# EAGLE board homeboard1 (EAGLE 6.0)
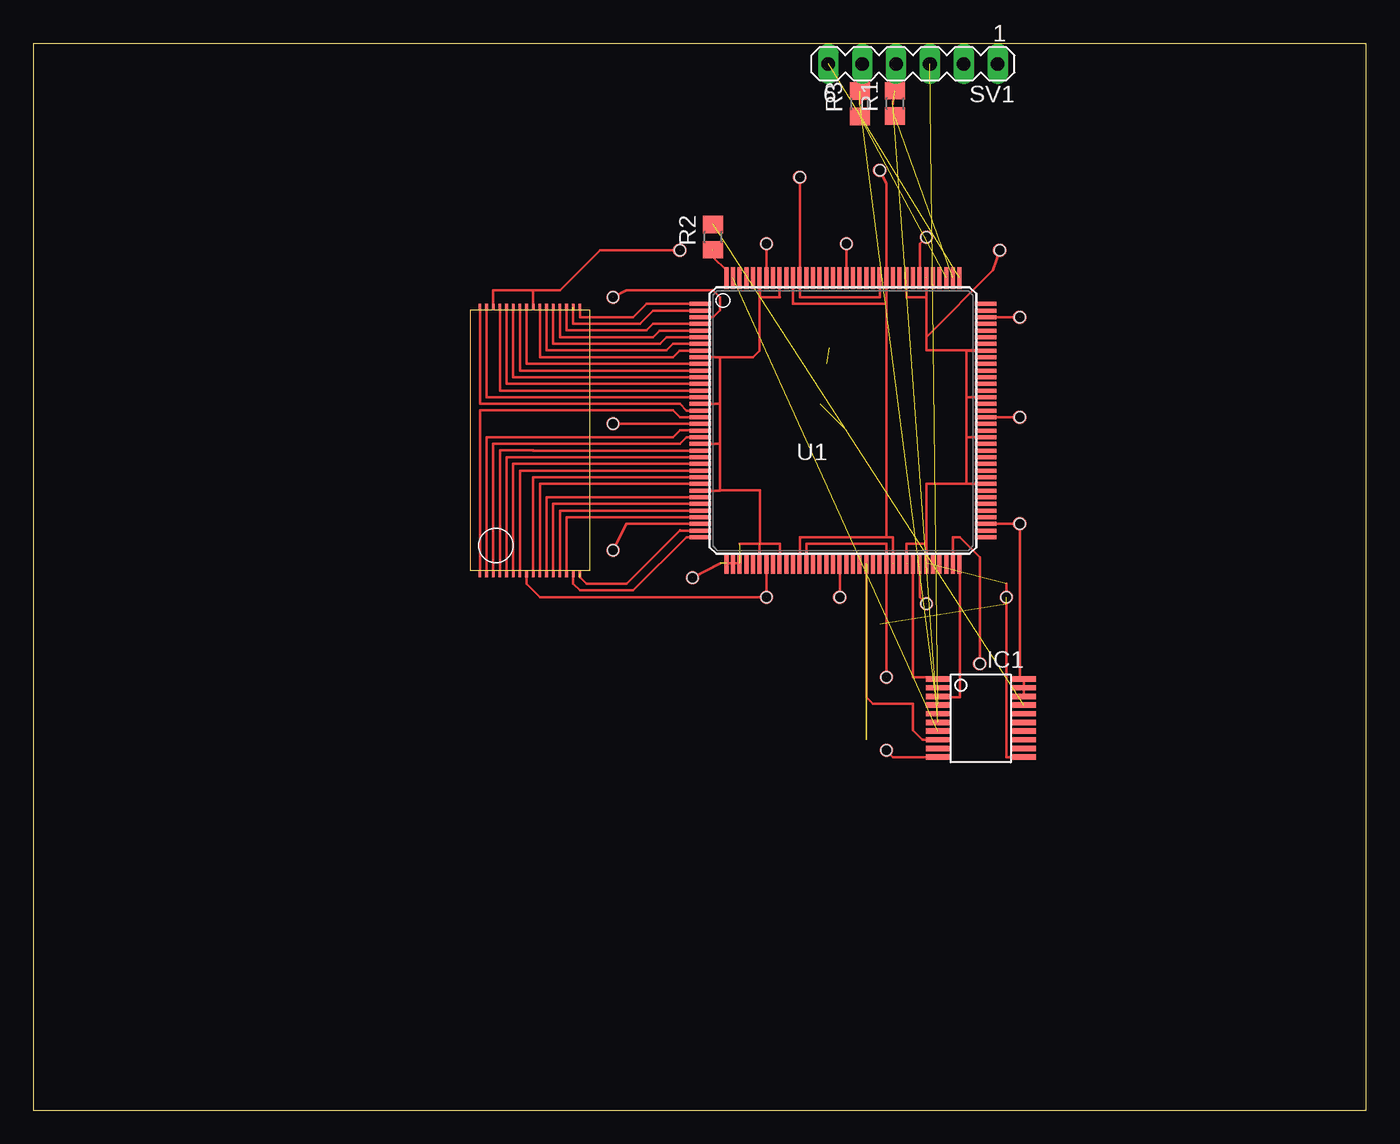
[diagram p0: board, top side]
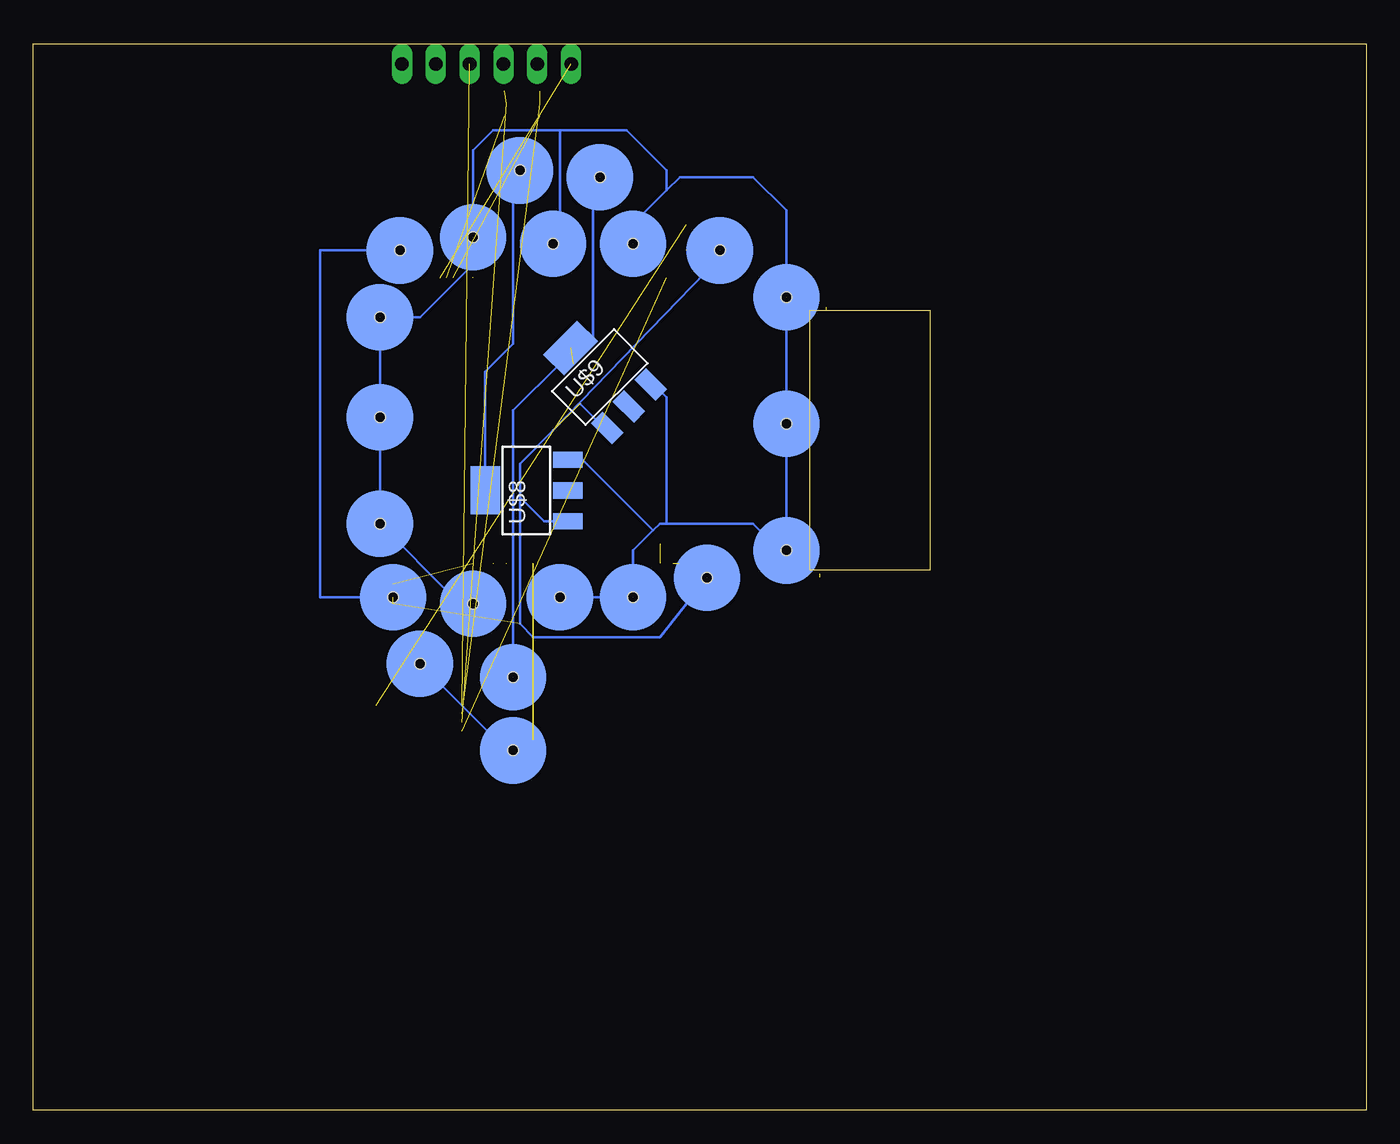
[diagram p1: board, bottom side, seen from below]

Size 100 x 80 mm. Coordinates in mm from the lower left corner, seen from the top.
Outline: 0,0 100,0 100,80 0,80 0,0
Copper layers (1*16): Top 0.0356mm / dielectric 1.5011mm / Bottom 0.0356mm
Design rules: minimum track width 6mil, minimum drill 13mil, track to track 6mil, track to pad 6mil, pad to pad 6mil, via to via 6mil, smd to smd 6mil, copper to edge 15mil, drill to drill 6mil, minimum pad ring 7mil, minimum via ring 7mil, stop-mask expansion 4mil, vias tented up to drill 0mil, thermal gap 10mil
Net classes: 0 default: width 0.203 mm, drill 0.254 mm, clearance 0.254 mm

## Footprints (pad centres in the part's own frame; a part is rotated, then mirrored left to right if it is on the bottom)
VO20 = smd 0.4 x 1.8: 1 5.85,6.15; 2 5.2,6.15; 3 4.55,6.15; 4 3.9,6.15; 5 3.25,6.15; 6 2.6,6.15; 7 1.95,6.15; 8 1.3,6.15; 9 0.65,6.15; 10 0,6.15; 11 0,-0.3; 12 0.65,-0.3; 13 1.3,-0.3; 14 1.95,-0.3; 15 2.6,-0.3; 16 3.25,-0.3; 17 3.9,-0.3; 18 4.55,-0.3; 19 5.2,-0.3; 20 5.85,-0.3
R0805 = smd 1.3 x 1.5: 1 -0.95,0; 2 0.95,0
MA06-1 = drill 1.016 long: 1 -6.35,0; 2 -3.81,0; 3 -1.27,0; 4 1.27,0; 5 3.81,0; 6 6.35,0
TQ144 = smd 1.6 x 0.3: P1 -10.7,8.75; P2 -10.7,8.25; P3 -10.7,7.75; P4 -10.7,7.25; P5 -10.7,6.75; P6 -10.7,6.25; P7 -10.7,5.75; P8 -10.7,5.25; P9 -10.7,4.75; P10 -10.7,4.25; P11 -10.7,3.75; P12 -10.7,3.25; P13 -10.7,2.75; P14 -10.7,2.25; P15 -10.7,1.75; P16 -10.7,1.25; P17 -10.7,0.75; P18 -10.7,0.25; P19 -10.7,-0.25; P20 -10.7,-0.75; P21 -10.7,-1.25; P22 -10.7,-1.75; P23 -10.7,-2.25; P24 -10.7,-2.75; P25 -10.7,-3.25; P26 -10.7,-3.75; P27 -10.7,-4.25; P28 -10.7,-4.75; P29 -10.7,-5.25; P30 -10.7,-5.75; P31 -10.7,-6.25; P32 -10.7,-6.75; P33 -10.7,-7.25; P34 -10.7,-7.75; P35 -10.7,-8.25; P36 -10.7,-8.75; P73 10.7,-8.75; P74 10.7,-8.25; P75 10.7,-7.75; P76 10.7,-7.25; P77 10.7,-6.75; P78 10.7,-6.25; P79 10.7,-5.75; P80 10.7,-5.25; P81 10.7,-4.75; P82 10.7,-4.25; P83 10.7,-3.75; P84 10.7,-3.25; P85 10.7,-2.75; P86 10.7,-2.25; P87 10.7,-1.75; P88 10.7,-1.25; P89 10.7,-0.75; P90 10.7,-0.25; P91 10.7,0.25; P92 10.7,0.75; P93 10.7,1.25; P94 10.7,1.75; P95 10.7,2.25; P96 10.7,2.75; P97 10.7,3.25; P98 10.7,3.75; P99 10.7,4.25; P100 10.7,4.75; P101 10.7,5.25; P102 10.7,5.75; P103 10.7,6.25; P104 10.7,6.75; P105 10.7,7.25; P106 10.7,7.75; P107 10.7,8.25; P108 10.7,8.75 | smd 0.3 x 1.6: P37 -8.75,-10.7; P38 -8.25,-10.7; P39 -7.75,-10.7; P40 -7.25,-10.7; P41 -6.75,-10.7; P42 -6.25,-10.7; P43 -5.75,-10.7; P44 -5.25,-10.7; P45 -4.75,-10.7; P46 -4.25,-10.7; P47 -3.75,-10.7; P48 -3.25,-10.7; P49 -2.75,-10.7; P50 -2.25,-10.7; P51 -1.75,-10.7; P52 -1.25,-10.7; P53 -0.75,-10.7; P54 -0.25,-10.7; P55 0.25,-10.7; P56 0.75,-10.7; P57 1.25,-10.7; P58 1.75,-10.7; P59 2.25,-10.7; P60 2.75,-10.7; P61 3.25,-10.7; P62 3.75,-10.7; P63 4.25,-10.7; P64 4.75,-10.7; P65 5.25,-10.7; P66 5.75,-10.7; P67 6.25,-10.7; P68 6.75,-10.7; P69 7.25,-10.7; P70 7.75,-10.7; P71 8.25,-10.7; P72 8.75,-10.7; P109 8.75,10.7; P110 8.25,10.7; P111 7.75,10.7; P112 7.25,10.7; P113 6.75,10.7; P114 6.25,10.7; P115 5.75,10.7; P116 5.25,10.7; P117 4.75,10.7; P118 4.25,10.7; P119 3.75,10.7; P120 3.25,10.7; P121 2.75,10.7; P122 2.25,10.7; P123 1.75,10.7; P124 1.25,10.7; P125 0.75,10.7; P126 0.25,10.7; P127 -0.25,10.7; P128 -0.75,10.7; P129 -1.25,10.7; P130 -1.75,10.7; P131 -2.25,10.7; P132 -2.75,10.7; P133 -3.25,10.7; P134 -3.75,10.7; P135 -4.25,10.7; P136 -4.75,10.7; P137 -5.25,10.7; P138 -5.75,10.7; P139 -6.25,10.7; P140 -6.75,10.7; P141 -7.25,10.7; P142 -7.75,10.7; P143 -8.25,10.7; P144 -8.75,10.7
VIA_DIY = smd 5 x 5 bottom: B 0,0 | smd 1 x 1: T 0,0 | hole 0.8: 0,0
TSOP32 = smd 0.5 x 0.2: P1 -9.75,3.75; P2 -9.75,3.25; P3 -9.75,2.75; P4 -9.75,2.25; P5 -9.75,1.75; P6 -9.75,1.25; P7 -9.75,0.75; P8 -9.75,0.25; P9 -9.75,-0.25; P10 -9.75,-0.75; P11 -9.75,-1.25; P12 -9.75,-1.75; P13 -9.75,-2.25; P14 -9.75,-2.75; P15 -9.75,-3.25; P16 -9.75,-3.75; P17 10.25,-3.75; P18 10.25,-3.25; P19 10.25,-2.75; P20 10.25,-2.25; P21 10.25,-1.75; P22 10.25,-1.25; P23 10.25,-0.75; P24 10.25,-0.25; P25 10.25,0.25; P26 10.25,0.75; P27 10.25,1.25; P28 10.25,1.75; P29 10.25,2.25; P30 10.25,2.75; P31 10.25,3.25; P32 10.25,3.75
SOT223 = smd 1.219 x 2.235: 1 -2.311,-3.099; 2 0,-3.099; 3 2.311,-3.099 | smd 3.6 x 2.2: 4 0,3.099

## Placement (x,y rotation side)
IC1  XCF02S  [VO20]  74,26.5 90 top
R1  100  [R0805]  64.66,75.53 90 top
R2  100  [R0805]  51,65.5 90 top
R3  100  [R0805]  62,75.5 90 top
SV1  jtag  [MA06-1]  66,78.5 180 top
U1  XC3S400TQ144  [TQ144]  60.74,51.74 0 top
U$1  VIA_DIY  [VIA_DIY]  64,32.5 0 top
U$2  VIA_DIY  [VIA_DIY]  73,38.5 0 top
U$3  VIA_DIY  [VIA_DIY]  48.5,64.5 0 top
U$4  AS6C4008  [TSOP32]  37.25,50 90 top
U$5  VIA_DIY  [VIA_DIY]  49.47,39.97 0 top
U$6  VIA_DIY  [VIA_DIY]  55,65 0 top
U$7  VIA_DIY  [VIA_DIY]  67,65.5 0 top
U$8  2.5V  [SOT223]  63,46.5 90 bottom
U$9  1.2V  [SOT223]  57.5,55 45 bottom
U$10  VIA_DIY  [VIA_DIY]  61,65 0 top
U$11  VIA_DIY  [VIA_DIY]  63.5,70.5 0 top
U$12  VIA_DIY  [VIA_DIY]  64,27 0 top
U$13  VIA_DIY  [VIA_DIY]  71,33.5 0 top
U$14  VIA_DIY  [VIA_DIY]  43.5,42 0 top
U$15  VIA_DIY  [VIA_DIY]  43.5,51.5 0 top
U$18  VIA_DIY  [VIA_DIY]  43.5,61 0 top
U$19  VIA_DIY  [VIA_DIY]  67,38 0 top
U$20  VIA_DIY  [VIA_DIY]  72.5,64.5 0 top
U$23  VIA_DIY  [VIA_DIY]  57.5,70 0 top
U$25  VIA_DIY  [VIA_DIY]  60.5,38.5 0 top
U$26  VIA_DIY  [VIA_DIY]  55,38.5 0 top
U$27  VIA_DIY  [VIA_DIY]  74,59.5 0 top
U$28  VIA_DIY  [VIA_DIY]  74,52 0 top
U$29  VIA_DIY  [VIA_DIY]  74,44 0 top

## Library data of the parts
IC1 = smd-special
R1-R3 = rcl
SV1 = con-lstb; OC_FARNELL: unknown; OC_NEWARK: unknown
U1 = xilinx_spartan3_virtex4_and_5
U$1-U$15 U$18-U$20 U$23 U$25-U$29 = cpcfpga

## Nets
GND: IC1.11 U1.P9 U1.P16 U1.P22 U1.P29 U1.P37 U1.P38 U1.P39 U1.P42 U1.P45 U1.P136 U1.P139 U$2.B U$3.B U$3.T U$4.P24 U$4.P30 U$5.B U$5.T U$8.1 U$9.1 U$20.B
N$1: U1.P1 U$4.P17
N$2: U1.P2 U$4.P18
N$3: U1.P126 U$10.T
N$4: U1.P64 U1.P67 U1.P81 U1.P88 U1.P94 U1.P101 U1.P114 U1.P117 U$2.T U$20.T
N$5: U1.P12 U$4.P27
N$6: U1.P13 U$4.P28
N$7: U1.P6 U$4.P21
N$8: R1.1 U1.P110
N$9: IC1.1 U1.P65
N$10: U1.P7 U$4.P22
N$11: U1.P8 U$4.P23
N$12: R2.1 U1.P144
N$13: IC1.17 R2.2
N$14: U1.P34 U$14.T
N$15: U1.P19 U$15.T
N$16: R3.1 U1.P111
N$17: IC1.7 U1.P143
N$18: IC1.8 U1.P58
N$19: IC1.3 U1.P72
N$20: U1.P71 U$13.T
N$22: U1.P10 U$4.P25
N$23: U1.P11 U$4.P26
N$24: U1.P14 U$4.P29
N$25: U1.P54 U$25.T
N$26: IC1.18 IC1.19 IC1.20 U1.P75 U$29.T
N$27: U1.P15 U$4.P31
N$28: U1.P91 U$28.T
N$29: U1.P17 U$4.P32
N$30: U1.P28 U$4.P10
N$31: U1.P30 U$4.P11
N$32: U1.P31 U$4.P12
N$33: U1.P20 U$4.P2
N$34: U1.P32 U$4.P13
N$35: U1.P33 U$4.P14
N$36: U1.P27 U$4.P9
N$37: U1.P35 U$4.P16
N$38: U1.P36 U$4.P15
N$39: U$8.4 U$11.B
N$40: IC1.10 U$12.T
N$41: U$12.B U$13.B
N$48: U1.P5 U$4.P20
N$49: U1.P4 U$4.P19
N$50: U1.P18 U$4.P1
N$52: U1.P23 U$4.P4
N$53: U1.P21 U$4.P3
N$54: U1.P24 U$4.P5
N$55: U1.P25 U$4.P6
N$56: U1.P26 U$4.P7
TCK: IC1.6 R1.2 SV1.4
TDI: IC1.4 SV1.3
TDO: SV1.6 U1.P109
TMS: IC1.5 R3.2 SV1.5
VCC: U1.P3 U1.P43 U1.P66 U1.P106 U1.P115 U1.P138 U$4.P8 U$6.B U$6.T U$7.B U$7.T U$8.3 U$9.3 U$10.B U$14.B U$15.B U$18.B U$18.T U$19.B U$19.T U$25.B U$26.B U$26.T U$27.B U$27.T U$28.B U$29.B
VCCAUX: U1.P48 U1.P62 U1.P120 U1.P134 U$11.T
VCCINT_B: U1.P49 U1.P61 U1.P121 U1.P133 U$1.B U$1.T U$9.4 U$23.B U$23.T

## Tracks (layer width: path | path; a pad name or v marks a point on that pad's centre or on a via)
GND  (8 unrouted)
  Top 0.2: U1.P45 56,42.5 54.5,42.5 | 54.49,42.5 U1.P42 | U1.P9 51.5,56.49 | 51.5,56.49 51.5,53 | U1.P16 51.5,53 | 51.5,53 51.5,50 | 51.5,50 U1.P22 | U1.P29 51.5,46.49 51.5,46.5 | 51.5,46.5 51.5,50 | 54.5,42.5 54.5,46.5 51.5,46.5 | 51.5,56.49 54,56.49 54.49,56.98 U1.P139 54.5,61 56,61 55.99,61.01 U1.P136 | 51.54,41.04 U$5.B | 52.99,42.49 53,42.5 54.5,42.5 | U$4.P24 37.5,61.5 | U$4.P30 34.5,61.5 37.5,61.5 | U$3.B 42.5,64.5 39.5,61.5 37.5,61.5 | U1.P37 U1.P38 U1.P39 | IC1.11 73,26.5 73,38
  Bottom 0.2: U$20.B 78.5,64.5 78.5,38.5 U$2.B | U$3.B 48.5,64 61,51 63.5,48.5 63.5,46 | 63.5,46 63.5,36.5 62.5,35.5 53,35.5 U$5.B | U$9.1 56.67,50.67 59,53 | U$8.1 61.69,44.19 63.5,46
N$1
  Top 0.2: U1.P1 45.99,60.49 45,59.5 41,59.5 U$4.P17
N$2  (1 unrouted)
  Top 0.2: U1.P2 46.49,59.99 45.5,59 40.5,59 40.5,60
N$3
  Top 0.2: U1.P126 U$10.T
N$4  (3 unrouted)
  Top 0.2: U1.P117 65.5,61 67,61 67,62.5 | U1.P114 67,58 | 67,58 67,57 U1.P101 70,56.99 70,53.5 | 70,53.5 U1.P94 | U1.P88 70,50.49 | 70,50.49 70,53.5 | U1.P81 70,46.99 70,47 | 70,47 70,50.49 | 67,42.5 67,47 70,47 | U1.P67 67,42.5 | 67,42.5 65.5,42.5 65.5,41 | U$20.T 72,63 67,58 | 73,39.5 U$2.T
N$5
  Top 0.2: U1.P12 36,54.99 U$4.P27
N$6
  Top 0.2: U1.P13 35.5,54.49 U$4.P28
N$7
  Top 0.2: U1.P6 47.49,57.99 47,57.5 39,57.5 U$4.P21
N$8  (1 unrouted)
N$9
  Top 0.2: U1.P65 66,32.5 67.85,32.5 IC1.1
N$10
  Top 0.2: U1.P7 47.99,57.49 47.5,57 38.5,57 U$4.P22
N$11
  Top 0.2: U1.P8 48.49,56.99 48,56.5 38,56.5 U$4.P23
N$12  (1 unrouted)
  Top 0.2: U1.P144 51.99,63.01 51,64 51,64.5
N$13  (1 unrouted)
N$14
  Top 0.2: U1.P34 44.5,43.99 U$14.T
N$15
  Top 0.2: U$15.T U1.P19
N$16  (1 unrouted)
N$17  (1 unrouted)
N$18  (2 unrouted)
  Top 0.2: IC1.8 66.7,27.8 66,28.5 66,30.5 63,30.5 62.5,31 62.5,41
N$19
  Top 0.2: U1.P72 69.5,31 68,31 68,31.05 IC1.3
N$20
  Top 0.2: U$13.T 71,41.5 69.5,43 69,43 U1.P71
N$22
  Top 0.2: U1.P10 37,55.99 U$4.P25
N$23
  Top 0.2: U1.P11 36.5,55.49 U$4.P26
N$24
  Top 0.2: U1.P14 35,53.99 U$4.P29
N$25
  Top 0.2: U1.P54 U$25.T
N$26
  Top 0.2: U1.P75 U$29.T 74,32.35 IC1.20 IC1.19 IC1.18
N$27
  Top 0.2: U1.P15 34,53.49 U$4.P31
N$28
  Top 0.2: U1.P91 U$28.T
N$29
  Top 0.2: U1.P17 49.01,52.49 48.5,53 33.5,53 U$4.P32
N$30
  Top 0.2: U1.P28 38,46.99 U$4.P10
N$31
  Top 0.2: U1.P30 38.5,45.99 U$4.P11
N$32
  Top 0.2: U1.P31 39,45.49 U$4.P12
N$33
  Top 0.2: U$4.P2 34,50.5 48,50.5 48.5,51 U1.P20
N$34
  Top 0.2: U1.P32 39.5,44.99 U$4.P13
N$35
  Top 0.2: U1.P33 40,44.49 U$4.P14
N$36
  Top 0.2: U1.P27 37.5,47.49 U$4.P9
N$37  (1 unrouted)
  Top 0.2: U1.P35 48.51,43.49 48.5,43.5 44.5,39.5 41.5,39.5 41,40
N$38
  Top 0.2: U1.P36 48.99,42.99 45,39 41,39 40.5,39.5 U$4.P15
N$39
  Bottom 0.2: U$8.4 66.1,55.4 64,57.5 64,69.5 U$11.B
N$40
  Top 0.2: IC1.10 64.5,26.5 U$12.T
N$41
  Bottom 0.2: U$12.B 64.5,27 U$13.B
N$48
  Top 0.2: U1.P5 46.99,58.49 46.5,58 39.5,58 U$4.P20
N$49
  Top 0.2: U1.P4 46.49,58.99 46,58.5 40,58.5 U$4.P19
N$50
  Top 0.2: U1.P18 48.51,51.99 48,52.5 33.5,52.5 U$4.P1
N$52
  Top 0.2: U1.P23 37.5,49.49 37.49,49.5 35,49.5 U$4.P4
N$53
  Top 0.2: U1.P21 48.99,50.49 48.5,50 34.5,50 U$4.P3
N$54
  Top 0.2: U1.P24 35.51,48.99 35.5,49 U$4.P5
N$55
  Top 0.2: U$4.P6 36,48.5 U1.P25
N$56
  Top 0.2: U1.P26 36.5,47.99 U$4.P7
TCK  (2 unrouted)
  Top 0.2: SV1.4 64.5,75.5
TDI  (1 unrouted)
TDO  (1 unrouted)
TMS  (2 unrouted)
  Top 0.2: SV1.5 62,75.5
VCC  (6 unrouted)
  Top 0.2: U1.P115 66.5,65 U$7.T | U1.P106 U$27.T | U1.P66 66.5,38.5 U$19.T | U1.P43 U$26.T 38,38.5 37,39.5 U$4.P8 | U1.P138 U$6.T | U1.P3 50.99,59.49 51.5,60 51.5,61 51,61.5 44.5,61.5 U$18.T
  Bottom 0.2: U$25.B U$26.T 55,42 53.5,43.5 | U$19.T 68.5,38.5 U$29.B U$28.B U$27.T 71,59.5 66.5,64 U$7.T 67,72 65.5,73.5 60.5,73.5 | U$6.T 55,66.5 52.5,69 | 52.5,69 52.5,70.5 55.5,73.5 60.5,73.5 | 60.5,73.5 60.5,67 U$10.B | 52.5,69 51.5,70 46,70 43.5,67.5 U$18.T U$15.B U$14.B 44.5,42.5 46,44 52.5,44 | 53.5,43.5 53,44 52.5,44 | U$9.3 53.44,54.44 52.5,53.5 52.5,44 | U$8.3 58.81,48.81 53.5,43.5
VCCAUX  (1 unrouted)
  Top 0.2: U1.P48 57.5,43 64,43 | 64.5,41 64.5,43 64,43 | 64,60.5 U1.P120 63.99,69.49 U$11.T | 64,60.5 56.99,60.5 U1.P134 | 64,43 64,60.5
VCCINT_B  (3 unrouted)
  Top 0.2: U$1.T 63.99,34.01 64,34.01 U1.P61 | U1.P61 64,42.5 57.99,42.5 U1.P49 | U1.P61 | U1.P121 63.5,61 57.5,61 U1.P133 | U1.P133 | U$23.T U1.P133
  Bottom 0.2: U$1.T 64,52.5 60.5,56 59.5,56 58,57.5 58,70 U$23.T